# Altium PCB ESPGith.PcbDoc
Units mil, origin at the board's own origin, x right, y up, seen from the top; angles counter-clockwise.
Board outline 2213 x 3029 mil, 2 copper layers (Top Layer, Bottom Layer); 47 components, 50 nets, 244 pads, 8 vias.
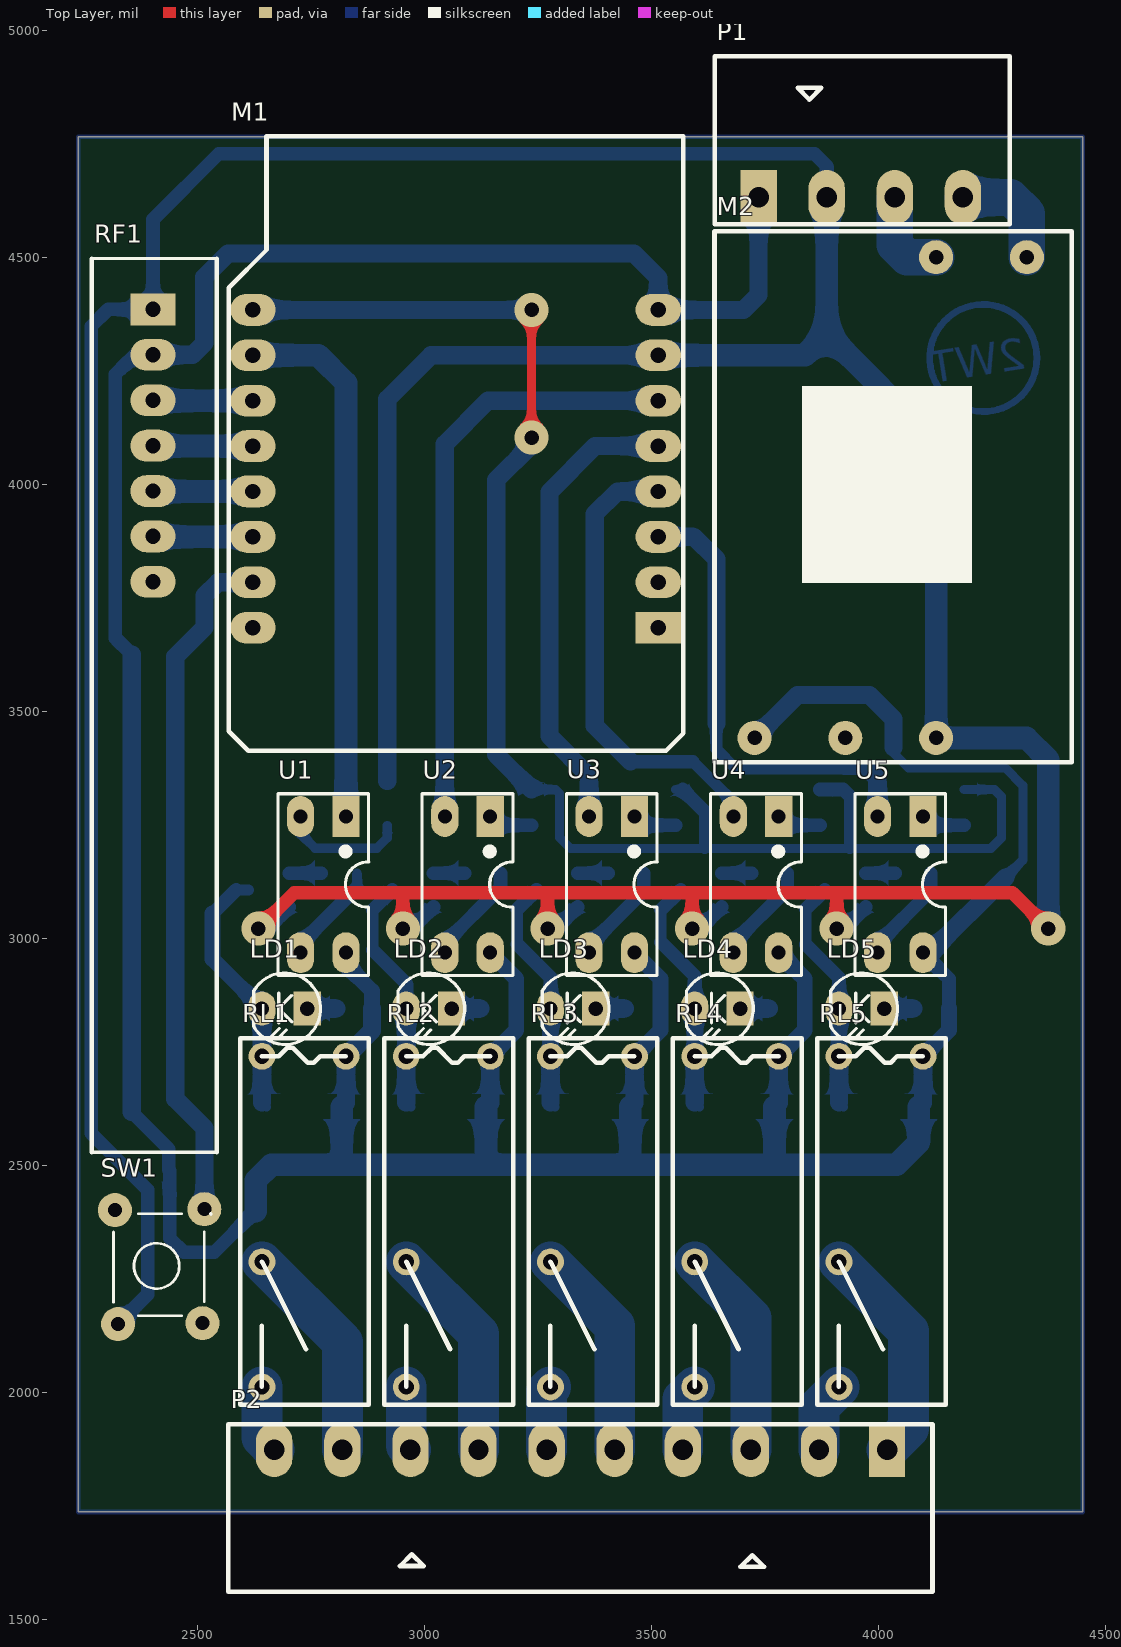
[diagram p0: Top Layer view]
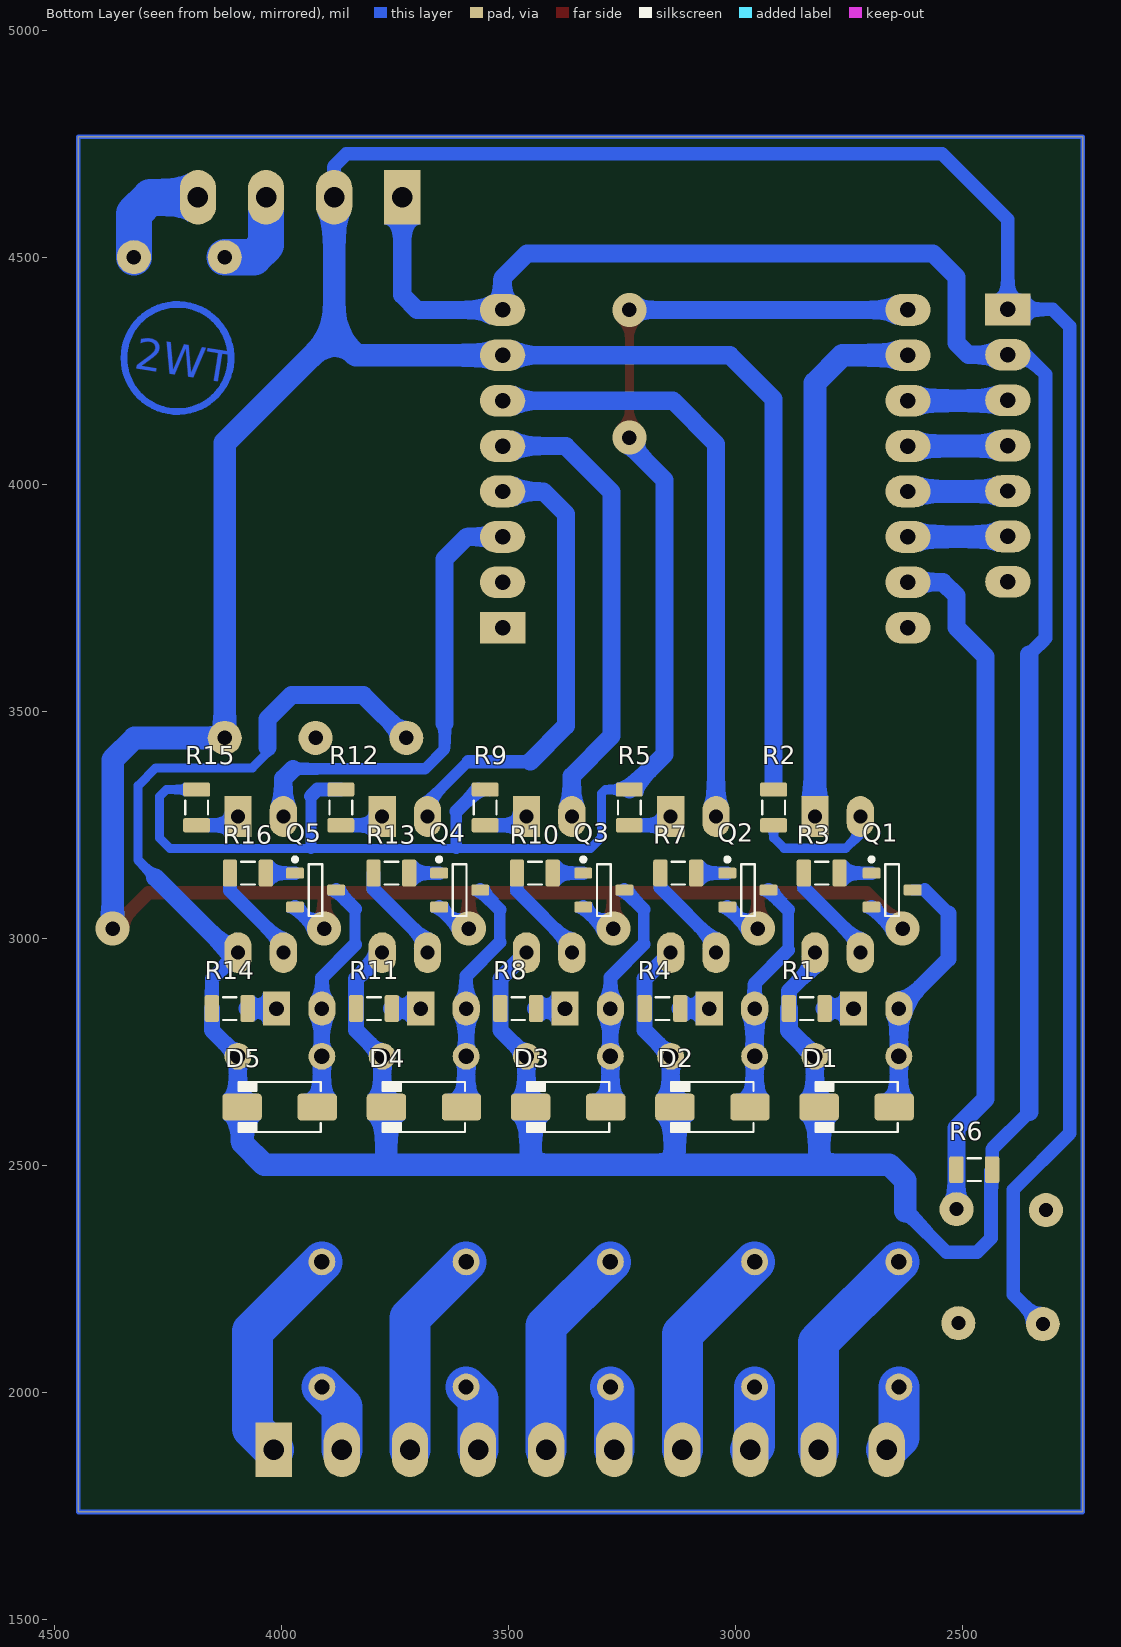
[diagram p1: Bottom Layer view, seen from below]
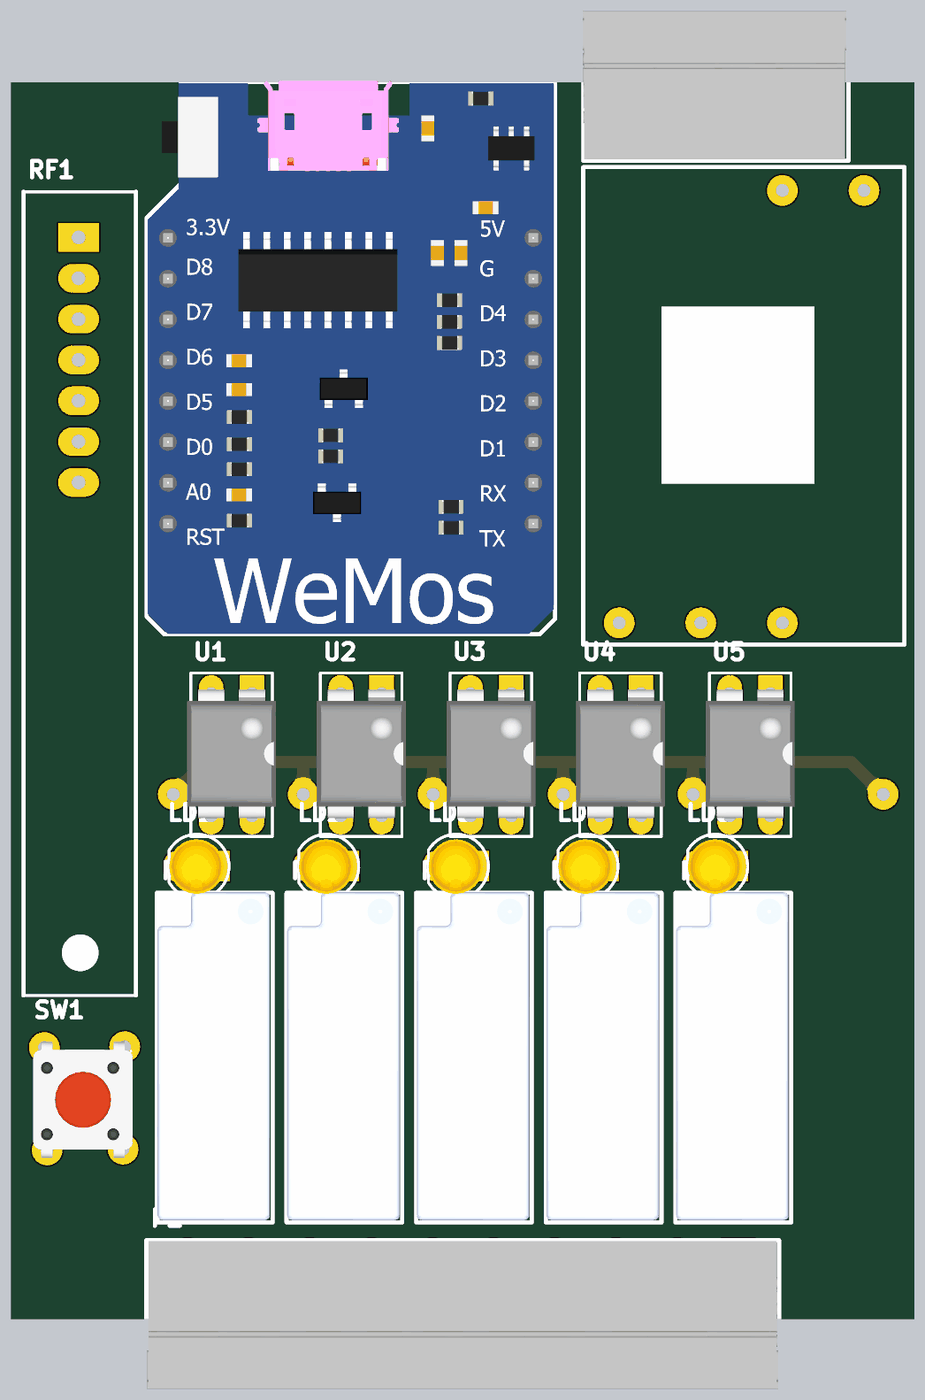
[diagram p2: 3D render of the assembled board from above, using the file's embedded part models]
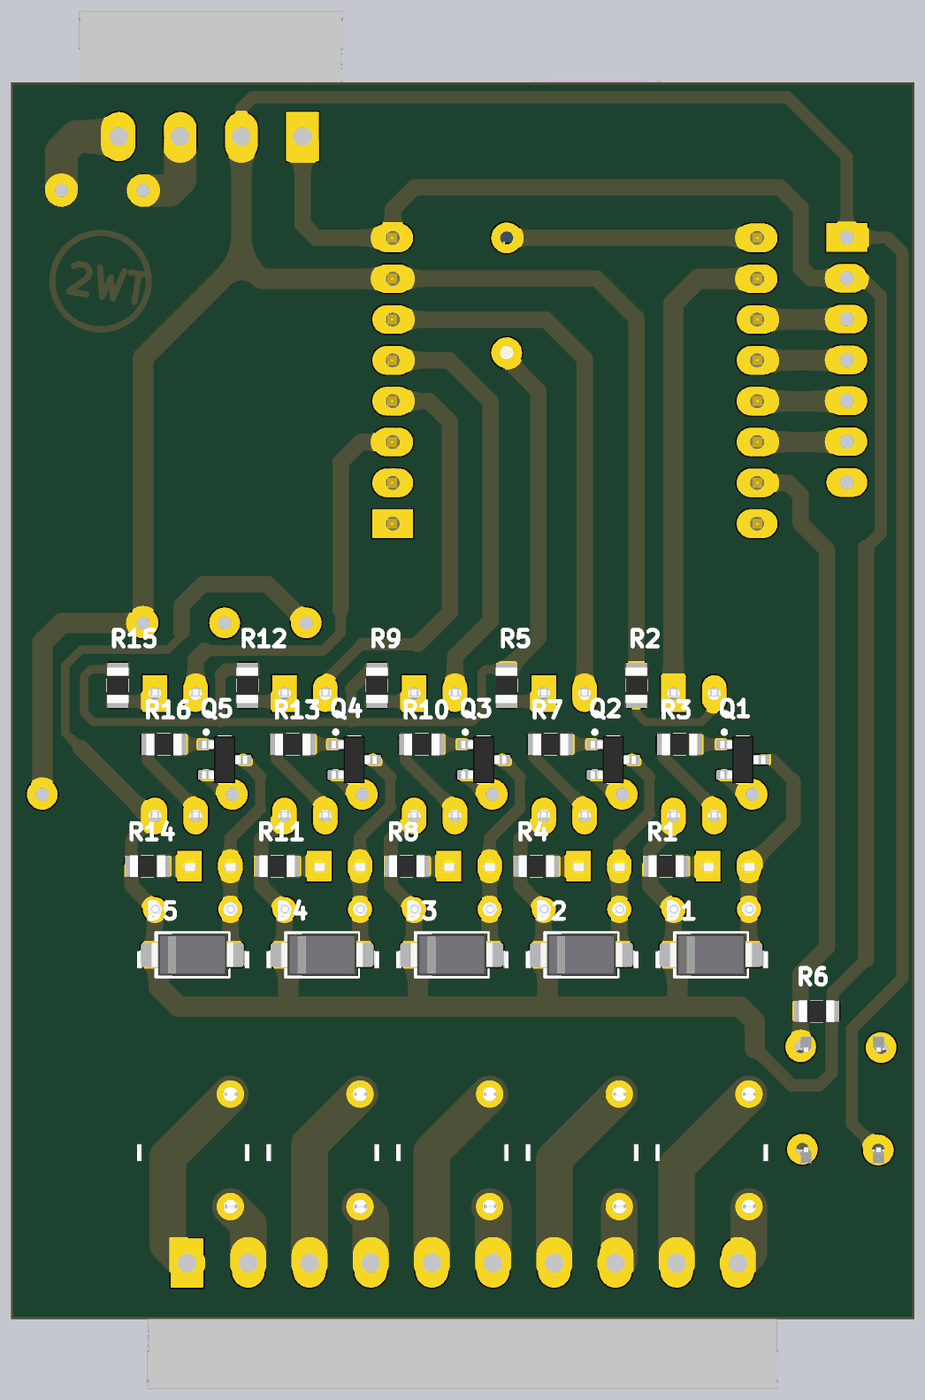
[diagram p3: 3D render of the assembled board from below, using the file's embedded part models]

## Layer stack, top to bottom
Top Solder: solder mask 0.4, Solder Resist, Dk 3.5
Top Layer: signal copper 1.4
Dielectric 1: dielectric 12.6, FR-4, Dk 4.8
Bottom Layer: signal copper 1.4
Bottom Solder: solder mask 0.4, Solder Resist, Dk 3.5

## Board outline
2236,1737 2236,4766 4449,4766 4449,1737

## Design rules (kind name [scope] priority, off if disabled: settings)
Clearance [All] p1: gap=15 ignorepadtopadclearanceinfootprint=FALSE
PolygonConnect [All] p1: connectstyle=Relief reliefconductorwidth=10 reliefentries=4 polygonreliefangle="90 Angle" airgapwidth=10
RoutingVias [All] p1: holewidth=32 width=75 viastyle="Through Hole" minholewidth=32 minwidth=75 maxholewidth=32 maxwidth=75
SolderMaskExpansion [All] p1: expansion=4
Width [All] p1: maxlimit=120 minlimit=15 preferedwidth=20
30 further rules are at their usual default settings.

## Components (designator, comment, footprint, x,y, rotation, side; value= is the part's Value field where it differs from the comment)
D1 "SS34" DO-214AC 2734,2629 r0 bottom value=1N4007
D2 "SS34" DO-214AC 3051.75,2629 r0 bottom value=1N4007
D3 "SS34" DO-214AC 3369.5,2629 r0 bottom value=1N4007
D4 "SS34" DO-214AC 3687.25,2629 r0 bottom value=1N4007
D5 "SS34" DO-214AC 4005,2629 r0 bottom value=1N4007
LD1 "CONNECTION" "LED-3mm Yellow" 2741,2846 r180 top
LD2 "CONNECTION" "LED-3mm Yellow" 3058.75,2846 r180 top
LD3 "CONNECTION" "LED-3mm Yellow" 3376.5,2846 r180 top
LD4 "CONNECTION" "LED-3mm Yellow" 3694.25,2846 r180 top
LD5 "CONNECTION" "LED-3mm Yellow" 4012,2846 r180 top
M1 "Wemos D1 Mini" "Wemos D1 Mini" 3651,4450 r180 top
M2 "AC-DC" "AC-DC 5V3W" 4326,4501.06 r270 top
P1 "POWER & INPUT" "TB 4 RA 3.81" 3735,4633 r0 top
P2 "RELAY OUT" "TB 10 RA 3.81" 4016,1874 r180 top
Q1 "C1815" SOT23-3 2656,3107 r180 bottom
Q2 "C1815" SOT23-3 2973.5,3107 r180 bottom
Q3 "C1815" SOT23-3 3291,3107 r180 bottom
Q4 "C1815" SOT23-3 3608.5,3107 r180 bottom
Q5 "C1815" SOT23-3 3926,3107 r180 bottom
R1 "220" RESC2012N_F 2844,2846 r0 bottom value=330
R2 "330" RESC2012N_F 2917,3289 r90 bottom value="R1/4W - 1K"
R3 "330" RESC2012N_F 2811,3144.4 r180 bottom value="R1/4W - 1K"
R4 "220" RESC2012N_F 3161.75,2846 r0 bottom value=330
R5 "330" RESC2012N_F 3234.75,3289 r90 bottom value="R1/4W - 1K"
R6 "10k" RESC2012N_F 2475,2491 r180 bottom value=470
R7 "330" RESC2012N_F 3127,3144.4 r180 bottom value="R1/4W - 1K"
R8 "220" RESC2012N_F 3479.5,2846 r0 bottom value=330
R9 "330" RESC2012N_F 3552.5,3289 r90 bottom value="R1/4W - 1K"
R10 "330" RESC2012N_F 3443,3144.4 r180 bottom value="R1/4W - 1K"
R11 "220" RESC2012N_F 3797.25,2846 r0 bottom value=330
R12 "330" RESC2012N_F 3870.25,3289 r90 bottom value="R1/4W - 1K"
R13 "330" RESC2012N_F 3759,3144.4 r180 bottom value="R1/4W - 1K"
R14 "220" RESC2012N_F 4115,2846 r0 bottom value=330
R15 "330" RESC2012N_F 4188,3289 r90 bottom value="R1/4W - 1K"
R16 "330" RESC2012N_F 4075,3144.4 r180 bottom value="R1/4W - 1K"
RF1 "RF Reciever" "RF Reciever" 2401,4388 r270 top
RL1 "Relay 5V" RL_HF46F 2641,2740.76 r270 top value="Relay SPDT, 10A, 12V"
RL2 "Relay 5V" RL_HF46F 2958.75,2740.76 r270 top value="Relay SPDT, 10A, 12V"
RL3 "Relay 5V" RL_HF46F 3276.5,2740.76 r270 top value="Relay SPDT, 10A, 12V"
RL4 "Relay 5V" RL_HF46F 3594.25,2740.76 r270 top value="Relay SPDT, 10A, 12V"
RL5 "Relay 5V" RL_HF46F 3912,2740.76 r270 top value="Relay SPDT, 10A, 12V"
SW1 "SW" SW4 2314,2154 r90 top value="SW chip 4 pin"
U1 "PC817" DIP4/W0.3 2826,3269 r180 top
U2 "PC817" DIP4/W0.3 3143.75,3269 r180 top
U3 "PC817" DIP4/W0.3 3461.5,3269 r180 top
U4 "PC817" DIP4/W0.3 3779.25,3269 r180 top
U5 "PC817" DIP4/W0.3 4097,3269 r180 top

## Footprints (in the part's own frame and the unit in brackets; to place one, negate y for a bottom-side part, rotate by r counter-clockwise, add the part's x,y. Pads: shape width x height; smd on the part's side, far side on the other; paste and mask are expansions set on the pad)
"AC-DC 5V3W" [mil] "AC-DC 5V3W"
  round 75 hole 32: 1(0,0) 2(0,-200) 3(1059.06,-600) 4(1059.06,-400) 5(1059.06,-200)
  silkscreen extent -57,-688 1112,99
DIP4/W0.3 [mil] "4 PIN, W 300mil, Pin to pin 100mil"
  rect 60x90 hole 31: 1(0,0)
  oval 60x90 hole 31: 2(100,0) 3(100,300) 4(0,300)
  silkscreen extent -50,-50 150,350, body extent -59,-10 159,305, height 170
DO-214AC [mm] "JEDEC DO214 variation AC. SMA"
  round 0.508 on Mech14: 0(0,0)
  rrect25% 2.2x1.5 smd: A(-2.1,0) K(2.1,0)
  silkscreen extent -2.3,-1.4 2.3,1.4, body extent -2.6,-1.3 2.6,1.3, height 2.42
"LED-3mm Yellow" [mil] "LED 2 PIN, 3ly Only colour"
  rect 60x75 hole 32: 1(0,0)
  oval 60x75 hole 32: 2(100,0)
  silkscreen extent -29,-78 118,79, body extent -16,-66 118,68, height 858
RESC2012N_F [mm] "Chip Resistor, Body 2.0x1.2mm, 0805, IPC Medium Density"
  round 0.254 on Mech14: 0(0,0)
  rrect25% 1x1.3 on Bottom Solder: 1(-1,0) 1(1,0)
  rrect25% 0.8x1.5 smd paste-1: 1(-1,0) 2(1,0)
  rrect25% 0.8x1.3 on Bottom Paste: 1(-1,0) 1(1,0)
  Top Layer pour cut-out: -0.6,0.75 0.6,0.75 0.6,-0.75 -0.6,-0.75
  silkscreen extent -0.38,-0.64 0.38,0.64, body extent -1.1,-0.67 1.1,0.68, height 0.69
"RF Reciever" [mil] "RF Reciever"
  round 90 on Top Overlay: 0(1754,4)
  rect 70x100 hole 34: 1(2,0)
  oval 70x100 hole 34: 2(102,0) 3(202,0) 4(302,0) 5(402,0) 6(502,0) 7(602,0)
  silkscreen extent -110,-135 1859,141
RL_HF46F [mm]
  round 1.5 hole 0.864: 1(0,4.7) 2(0,0) 3(11.5,0)
  round 1.5 hole 0.85: 4(18.5,0)
  silkscreen extent -1.02,-1.22 19.48,5.98, body extent -1.06,-1.18 19.34,5.82, height 14.79
SOT23-3 [mm] "SOT23, 3 pin"
  round 0.5 on Mech14: 0(0,0)
  rrect25% 1x0.6 smd: 1(-1.15,0.95) 2(-1.15,-0.95) 3(1.15,0)
  silkscreen extent -1.25,-1.45 0.38,1.81, body extent -1.4,-1.45 1.4,1.45, height 1.29
SW4 [mil] "SW button 4pin, 250 x250 mil"
  round 75 hole 31: 1(-3,-10) 2(250,-200) 3(248,-3) 4(-1,-196)
  silkscreen extent 15,-215 240,0, body extent -36,-220 276,24, height 276
"TB 4 RA 3.81" [mil] "3.81mm"
  rect 80x120 hole 45: 1(0,0)
  oval 80x120 hole 45: 2(150,0) 3(300,0) 4(450,0)
  silkscreen extent -97,-59 553,311, body extent -99,-55 548,307, height 304
"TB 10 RA 3.81" [mil]
  rect 80x120 hole 45: 1(-2,0)
  oval 80x120 hole 45: 2(148,0) 3(298,0) 4(448,0) 5(598,0) 6(748,0) 7(898,0) 8(1048,0) 9(1198,0) 10(1348,0)
  silkscreen extent -102,-56 1449,313, body extent -100,-54 1447,308, height 311
"Wemos D1 Mini" [mil] "Wemos D1 Mini"
  rect 100x70 hole 34: 1(137,765)
  oval 100x70 hole 34: 2(137,665) 3(137,565) 4(137,465) 5(137,365) 6(137,265) 7(137,165) 8(137,65) 9(1030,65) 10(1030,165) 11(1030,265) 12(1030,365) 13(1030,465) 14(1030,565) 15(1030,665) 16(1030,765)
  silkscreen extent 82,-317 1083,1036, body extent 85,-320 1081,1035, height 414

## Part data
D1 D2 D3 D4 D5: library part D1A, "Diode 1A"
LD1 LD2 LD3 LD4 LD5: library part LED2, "Typical RED, GREEN, YELLOW, AMBER GaAs LED", LatestRevisionDate=17-Jul-2002, LatestRevisionNote="Re-released for DXP Platform.", PackageDescription="SM LED; 2 Flat Leads", PackageReference=3.2X1.6X1.1, PackageVersion=Feb-2002, Published=8-Jun-2000, Publisher="Altium Limited"
M2: library part "AC-DC 5V3W", "AC -> DC 5V 3W"
P1: library part "Header 4", "Header, 4-Pin", LatestRevisionDate=17-Jul-2002, LatestRevisionNote="Re-released for DXP Platform.", Publisher="Altium Limited"
P2: library part "Header 10", "Header, 10-Pin", LatestRevisionDate=17-Jul-2002, LatestRevisionNote="Re-released for DXP Platform.", Publisher="Altium Limited"
Q1 Q2 Q3 Q4 Q5: "NPN 600mW, ECB", =C2383
R1 R4 R8 R11 R14: library part "Res 1/4 W", "Resistor", LatestRevisionDate=17-Jul-2002, LatestRevisionNote="Re-released for DXP Platform.", PackageReference=AXIAL-0.4, Published=8-Jun-2000, Publisher="Altium Limited"
R2 R3 R5 R7 R9 R10 R12 R13 R15 R16: library part R1/4W, "Resistor 1/4W"
R6: library part R0805, "Resistor SMD 0805", LatestRevisionDate=17-Jul-2002, LatestRevisionNote="Re-released for DXP Platform.", PackageReference=AXIAL-0.4, Published=8-Jun-2000, Publisher="Altium Limited"
RL1 RL2 RL3 RL4 RL5: library part "Relay 3", "Relay SPDT,10A - 12VDC 5 Pin", ="Relay SPDT, 10A, 24V"
SW1: library part SW4-1, "Switch button 4 pin"
U1 U2 U3 U4 U5: "Single Opto"

## Via types
v1: diameter 75, hole 32, Top Layer to Bottom Layer, 8 vias

## Nets (pads, with @x,y where several pads share a name; then routed paths per layer and width w, separated by ;. In a path a pad name is that pad's centre, name@x,y a point inside that pad or via, vN(x,y) a via of type N, cw(c..) or ccw(c..) an arc to the next point about the centre after c; other vN are vias at no path point)
3.3V: M1.9 R5.2 R9.2 R12.2 R15.2 | length 3420.8
  Top Layer w20: v1(3234.75,4103.75) v1(3234.75,4385)
  Bottom Layer w20: R5.2 3287.63,3328.37 3296,3320 3296,3223 3320.07,3198.93 3616,3198.93 3936,3198.93 4246.93,3198.93 4270,3222 4270,3313 4254.63,3328.37 R15.2 ; v1@3234.75,4087.75 v1(3234.75,4103.75) ; R9.2 R9.2@3567.63,3328.37
  Bottom Layer w25: 3616,3198.93 3616,3280 ; 3936,3198.93 3936,3314
  Bottom Layer w30: R9.2@3567.63,3328.37 3616,3280 ; R12.2 3921.63,3328.37 3936,3314
  Bottom Layer w40: M1.9 v1(3234.75,4385) ; R5.2 3157,3406.12 3157,4010 v1@3234.75,4087.75
5V: D1.K D2.K D3.K D4.K D5.K M1.8 M2.3 P1.1 R1.2 R4.2 R6.2 R8.2 R11.2 R14.2 RF1.2 RL1.1 RL2.1 RL3.1 RL4.1 RL5.1 U1.4 U2.4 U3.4 U4.4 U5.4 | length 9465.5
  Bottom Layer w20: RF1.2@2361,4286 RF1.2 ; 2788,2502 2816.68,2530.68 ; D1.K D1.K@2826.04,2638.36 ; U1.4@2826,2942 U1.4 ; 3134.43,2532.57 3165,2502 ; D2.K D2.K@3143.79,2638.36 ; 3425,2502 3452.18,2529.18 ; D3.K D3.K@3461.54,2638.36 ; 3769.93,2529.07 3770,2529 ; D4.K D4.K@3779.29,2638.36 ; 4032,3421 4032,3409 4065,3376 4278,3376 4317,3337 4317,3173 4279,3135 ; D5.K D5.K@4097.04,2638.36
  Bottom Layer w30: 2354,2618 2435.63,2536.37 R6.2 2438,2488.63 2438,2340 2469,2309 2536,2309 2627,2400 ; 2354,3626 2318,3662 2318,4243 RF1.2@2361,4286 ; U5.4 4154.37,2911.63 R14.2
  Bottom Layer w35: U1.4@2826,2942 2883.37,2884.63 R1.2 ; U2.4 3201.12,2911.63 R4.2 3201.12,2798.09 RL2.1 ; U3.4 3518.87,2911.63 R8.2 3518.87,2798.09 RL3.1 ; U4.4 3836.62,2911.63 R11.2 3836.62,2798.09 RL4.1 ; RL5.1 4154.37,2798.09 R14.2
  Bottom Layer w40: 2354,2618 2354,3626 ; RF1.2 2488,4286 2514,4312 2514,4457 2566,4509 3460,4509 3514,4455 M1.8 3702,4385 3735,4418 P1.1 ; D1.K@2826.04,2638.36 RL1.1 2883.37,2798.09 R1.2 ; D2.K@3143.79,2638.36 RL2.1 ; D3.K@3461.54,2638.36 RL3.1 ; M2.3 3821,3537 3979,3537 4032,3484 4032,3421 ; D4.K@3779.29,2638.36 RL4.1 ; U5.4 4113,2969 4279,3135 ; D5.K@4097.04,2638.36 RL5.1
  Bottom Layer w50: 2627,2400 2627,2467 2662,2502 2788,2502 3165,2502 3425,2502 4039,2502 4087.68,2550.68 D5.K ; 2816.68,2530.68 D1.K ; 3134.43,2532.57 D2.K ; 3452.18,2529.18 D3.K ; 3769.93,2529.07 D4.K
AC_LINE: M2.1 P1.4 | length 251.9
  Bottom Layer w80: P1.4 4290,4633 4326,4597 M2.1
AC_NEUT: M2.2 P1.3 | length 207.2
  Bottom Layer w80: P1.3 4035,4528 4061.94,4501.06 M2.2
GND: M1.7 M2.5 P1.2 Q1.2 Q2.2 Q3.2 Q4.2 Q5.2 R2.2 RF1.1 SW1.1 | length 10605.6
  Top Layer w30: v1(2633,3022) 2712,3101 2947,3101 ; v1(2951.5,3022) 2951.5,3096.5 2947,3101 ; v1(3270,3022) 3270,3099 3268,3101 ; v1(3588.5,3022) 3588.5,3099.5 3587,3101 ; v1(3907,3022) 3907,3096 3902,3101 ; v1(4373,3022) 4294,3101 3902,3101 ; 2947,3101 3268,3101 ; 3268,3101 3587,3101 ; 3587,3101 3902,3101
  Bottom Layer w30: SW1.1 2389,2216 2389,2447 2265,2571 2265,4349 2302,4386 RF1.1 2401,4584 2546,4729 3858,4729 3885,4702 P1.2 ; v1(2633,3022) 2653.68,3022 Q1.2 ; v1(2951.5,3022) 2971.18,3022 Q2.2 ; v1(3270,3022) 3288.68,3022 Q3.2 ; v1(3588.5,3022) 3606.18,3022 Q4.2 ; v1(3907,3022) 3923.68,3022 Q5.2
  Bottom Layer w40: 2917,3347.37 2917,4189 3013,4285 M1.7
  Bottom Layer w50: M1.7 3837,4285 3885,4333 ; P1.2 3885,4333 ; v1(4373,3022) 4373,3394 4325,3442 M2.5 4126,4092 3885,4333
NetD1_A: D1.A LD1.2 Q1.3 RL1.2 | length 575.7
  Bottom Layer w20: D1.A@2641,2639.32 D1.A
  Bottom Layer w25: 2584,3107 Q1.3
  Bottom Layer w30: 2532,3055 2584,3107
  Bottom Layer w35: 2532,3055 2532,2955 LD1.2
  Bottom Layer w40: D1.A@2641,2639.32 RL1.2 LD1.2
NetD2_A: D2.A LD2.2 Q2.3 RL2.2 | length 530.7
  Bottom Layer w20: D2.A@2958.75,2639.32 D2.A
  Bottom Layer w25: 2885,2975 2885,3063.78
  Bottom Layer w30: 2885,2975 2958.75,2901.25 LD2.2 ; 2885,3063.78 Q2.3
  Bottom Layer w40: D2.A@2958.75,2639.32 RL2.2 LD2.2
NetD3_A: D3.A LD3.2 Q3.3 RL3.2 | length 530.4
  Bottom Layer w20: D3.A@3276.5,2639.32 D3.A
  Bottom Layer w25: 3203,2988 3203,3064.28
  Bottom Layer w30: 3203,2988 3276.5,2914.5 LD3.2 ; 3203,3064.28 Q3.3
  Bottom Layer w35: RL3.2 LD3.2
  Bottom Layer w40: D3.A@3276.5,2639.32 RL3.2
NetD4_A: D4.A LD4.2 Q4.3 RL4.2 | length 530.9
  Bottom Layer w20: D4.A@3594.25,2639.32 D4.A
  Bottom Layer w25: 3520,2992 3520,3063.78
  Bottom Layer w30: 3520,2992 3594.25,2917.75 LD4.2 ; 3520,3063.78 Q4.3
  Bottom Layer w35: RL4.2 LD4.2
  Bottom Layer w40: D4.A@3594.25,2639.32 RL4.2
NetD5_A: D5.A LD5.2 Q5.3 RL5.2 | length 529.8
  Bottom Layer w20: D5.A@3912,2639.32 D5.A
  Bottom Layer w25: 3839,2987 3839,3065.28
  Bottom Layer w30: 3839,2987 3912,2914 LD5.2 ; 3839,3065.28 Q5.3
  Bottom Layer w35: RL5.2 LD5.2
  Bottom Layer w40: D5.A@3912,2639.32 RL5.2
NetLD1_1: LD1.1 R1.1@2804.63,2846 | length 63.6
  Bottom Layer w40: LD1.1 R1.1@2804.63,2846
NetLD2_1: LD2.1 R4.1@3122.38,2846 | length 63.6
  Bottom Layer w40: LD2.1 R4.1@3122.38,2846
NetLD3_1: LD3.1 R8.1@3440.13,2846 | length 63.6
  Bottom Layer w40: LD3.1 R8.1@3440.13,2846
NetLD4_1: LD4.1 R11.1@3757.88,2846 | length 63.6
  Bottom Layer w40: LD4.1 R11.1@3757.88,2846
NetLD5_1: LD5.1 R14.1@4075.63,2846 | length 63.6
  Bottom Layer w40: LD5.1 R14.1@4075.63,2846
NetQ1_1: Q1.1 R3.2 | length 70.4
  Bottom Layer w30: Q1.1 R3.2
NetQ2_1: Q2.1 R7.2 | length 68.9
  Bottom Layer w30: Q2.1 R7.2
NetQ3_1: Q3.1 R10.2 | length 67.4
  Bottom Layer w30: Q3.1 R10.2
NetQ4_1: Q4.1 R13.2 | length 65.9
  Bottom Layer w30: Q4.1 R13.2
NetQ5_1: Q5.1 R16.2 | length 64.4
  Bottom Layer w30: Q5.1 R16.2
NetR2_1: R2.1@2917,3249.63 U1.2 | length 279.4
  Bottom Layer w20: U1.2 2726,3231 2758,3199 2894,3199 2917,3222 R2.1@2917,3249.63
NetR3_1: R3.1@2850.37,3144.4 U1.3 | length 226.9
  Bottom Layer w20: U1.3 U1.3@2726,2988 ; 2850.37,3112.37 R3.1@2850.37,3144.4
  Bottom Layer w30: U1.3@2726,2988 2850.37,3112.37
NetR5_1: R5.1@3234.75,3249.63 U2.1 | length 99
  Bottom Layer w20: U2.1 U2.1@3163.12,3249.63
  Bottom Layer w30: U2.1@3163.12,3249.63 R5.1@3234.75,3249.63
NetR7_1: R7.1@3166.37,3144.4 U2.3 | length 226.2
  Bottom Layer w30: U2.3 3043.75,2989.75 3166.37,3112.37 R7.1@3166.37,3144.4
NetR9_1: R9.1@3552.5,3249.63 U3.1 | length 99
  Bottom Layer w20: U3.1 U3.1@3480.87,3249.63
  Bottom Layer w30: U3.1@3480.87,3249.63 R9.1@3552.5,3249.63
NetR10_1: R10.1@3482.37,3144.4 U3.3 | length 225.5
  Bottom Layer w30: U3.3 3361.5,2984.5 3482.37,3105.37 R10.1@3482.37,3144.4
NetR12_1: R12.1@3870.25,3249.63 U4.1 | length 99
  Bottom Layer w20: U4.1 U4.1@3798.62,3249.63
  Bottom Layer w30: U4.1@3798.62,3249.63 R12.1@3870.25,3249.63
NetR13_1: R13.1@3798.37,3144.4 U4.3 | length 224.7
  Bottom Layer w30: U4.3 3679.25,2990.25 3798.37,3109.37 R13.1@3798.37,3144.4
NetR15_1: R15.1@4188,3249.63 U5.1 | length 99
  Bottom Layer w20: U5.1 U5.1@4116.37,3249.63
  Bottom Layer w30: U5.1@4116.37,3249.63 R15.1@4188,3249.63
NetR16_1: R16.1@4114.37,3144.4 U5.3 | length 224
  Bottom Layer w30: U5.3 3997,2988 4114.37,3105.37 R16.1@4114.37,3144.4
REL_CO1: P2.9 RL1.3 | length 487.3
  Bottom Layer w90: RL1.3 2818,2111 P2.9
REL_CO2: P2.7 RL2.3 | length 480
  Bottom Layer w90: RL2.3 3118,2128.75 P2.7
REL_CO3: P2.5 RL3.3 | length 472.6
  Bottom Layer w90: RL3.3 3418,2146.5 P2.5
REL_CO4: P2.3 RL4.3 | length 465.3
  Bottom Layer w90: RL4.3 3718,2164.25 P2.3
REL_CO5: P2.1 RL5.3 | length 496.8
  Bottom Layer w90: RL5.3 4065,2135 4065,1921 P2.1
REL_NC1: P2.10 RL1.4 | length 149.6
  Bottom Layer w90: RL1.4 2641,1901 P2.10
REL_NC2: P2.8 RL2.4 | length 142.2
  Bottom Layer w90: RL2.4 2958.75,1883.25 P2.8
REL_NC3: P2.6 RL3.4 | length 141.9
  Bottom Layer w90: P2.6 3268,2003.91 RL3.4
REL_NC4: P2.4 RL4.4 | length 149.3
  Bottom Layer w90: P2.4 3568,1986.16 RL4.4
REL_NC5: P2.2 RL5.4 | length 156.6
  Bottom Layer w90: P2.2 3868,1968.41 RL5.4
"RELAY 1": M1.10 U1.1 | length 1185.3
  Bottom Layer w50: M1.10 2765,4285 2826,4224 U1.1
"RELAY 2": M1.6 U2.2 | length 1330.5
  Bottom Layer w40: U2.2 3043.75,4089.75 3139,4185 M1.6
"RELAY 3": M1.5 U3.2 | length 1033.1
  Bottom Layer w40: U3.2 3361.5,3358.5 3274,3446 3274,3984 3375,4085 M1.5
"RELAY 4": M1.4 U4.2 | length 1033.4
  Bottom Layer w20: U4.2 U4.2@3679.25,3300.75
  Bottom Layer w25: 3590,3390 U4.2@3679.25,3300.75
  Bottom Layer w30: 3453,3390 3590,3390
  Bottom Layer w40: 3453,3390 3374,3469 3374,3935 3424,3985 M1.4
"RELAY 5": M1.3 U5.2 | length 1032.8
  Bottom Layer w25: 3642,3474 3642,3417 3685,3374 3976,3374
  Bottom Layer w40: M1.3 3593,3885 3642,3836 3642,3474 ; 3976,3374 3997,3353 U5.2
RFD0: M1.11 RF1.3 | length 220.4
  Bottom Layer w20: RF1.3 RF1.3@2402,4185
  Bottom Layer w50: RF1.3@2402,4185 M1.11
RFD1: M1.12 RF1.4 | length 220.4
  Bottom Layer w20: RF1.4 RF1.4@2402,4085
  Bottom Layer w50: RF1.4@2402,4085 M1.12
RFD2: M1.13 RF1.5 | length 220.4
  Bottom Layer w20: RF1.5 RF1.5@2402,3985
  Bottom Layer w50: RF1.5@2402,3985 M1.13
RFD3: M1.14 RF1.6 | length 220.4
  Bottom Layer w20: RF1.6 RF1.6@2402,3885
  Bottom Layer w50: RF1.6@2402,3885 M1.14
Select: M1.15 R6.1@2514.37,2491 SW1.2 | length 1523.8
  Bottom Layer w20: SW1.2 SW1.2@2514.37,2404.37
  Bottom Layer w40: SW1.2@2514.37,2404.37 2514.37,2491 2514.37,2582.63 2450,2647 2450,3621 2514.37,3685.37 2514.37,3755.37 2544,3785 M1.15
pads on no net: D1.0 D2.0 D3.0 D4.0 D5.0 M1.1 M1.2 M1.16 M2.4 Q1.0 Q2.0 Q3.0 Q4.0 Q5.0 R1.0 R1.1@2804.63,2846 R1.1@2804.63,2846.01 R1.1@2883.37,2846 R1.1@2883.37,2846.01 R2.0 R2.1@2916.99,3249.63 R2.1@2916.99,3328.37 R2.1@2917,3249.63 R2.1@2917,3328.37 R3.0 R3.1@2771.63,3144.4 R3.1@2850.37,3144.4 R4.0 R4.1@3122.38,2846 R4.1@3122.38,2846.01 R4.1@3201.12,2846 R4.1@3201.12,2846.01 R5.0 R5.1@3234.74,3249.63 R5.1@3234.74,3328.37 R5.1@3234.75,3249.63 R5.1@3234.75,3328.37 R6.0 R6.1@2435.63,2490.99 R6.1@2435.63,2491 R6.1@2514.37,2490.99 R6.1@2514.37,2491 R7.0 R7.1@3087.63,3144.4 R7.1@3166.37,3144.4 R8.0 R8.1@3440.13,2846 R8.1@3440.13,2846.01 R8.1@3518.87,2846 R8.1@3518.87,2846.01 R9.0 R9.1@3552.5,3249.63 R9.1@3552.5,3328.37 R9.1@3552.49,3249.63 R9.1@3552.49,3328.37 R10.0 R10.1@3403.63,3144.4 R10.1@3482.37,3144.4 R11.0 R11.1@3757.88,2846 R11.1@3757.88,2846.01 R11.1@3836.62,2846 R11.1@3836.62,2846.01 R12.0 R12.1@3870.24,3249.63 R12.1@3870.24,3328.37 R12.1@3870.25,3249.63 R12.1@3870.25,3328.37 R13.0 R13.1@3719.63,3144.4 R13.1@3798.37,3144.4 R14.0 R14.1@4075.63,2846 R14.1@4075.63,2846.01 R14.1@4154.37,2846 R14.1@4154.37,2846.01 R15.0 R15.1@4187.99,3249.63 R15.1@4187.99,3328.37 R15.1@4188,3249.63 R15.1@4188,3328.37 R16.0 R16.1@4035.63,3144.4 R16.1@4114.37,3144.4 RF1.0 RF1.7 SW1.3 SW1.4
copper on no net: | length 11225.5
  Bottom Layer w10: 2236,1737 2236,4766 4449,4766 4449,1737 2236,1737
  Bottom Layer w15: 4348.02,4279 ccw(c4230,4279) 4348.02,4279

## Other copper
Bottom Layer:
  text "2WT" at 4328,4256 h70 r9